# EAGLE board USBasp (EAGLE 4.16)
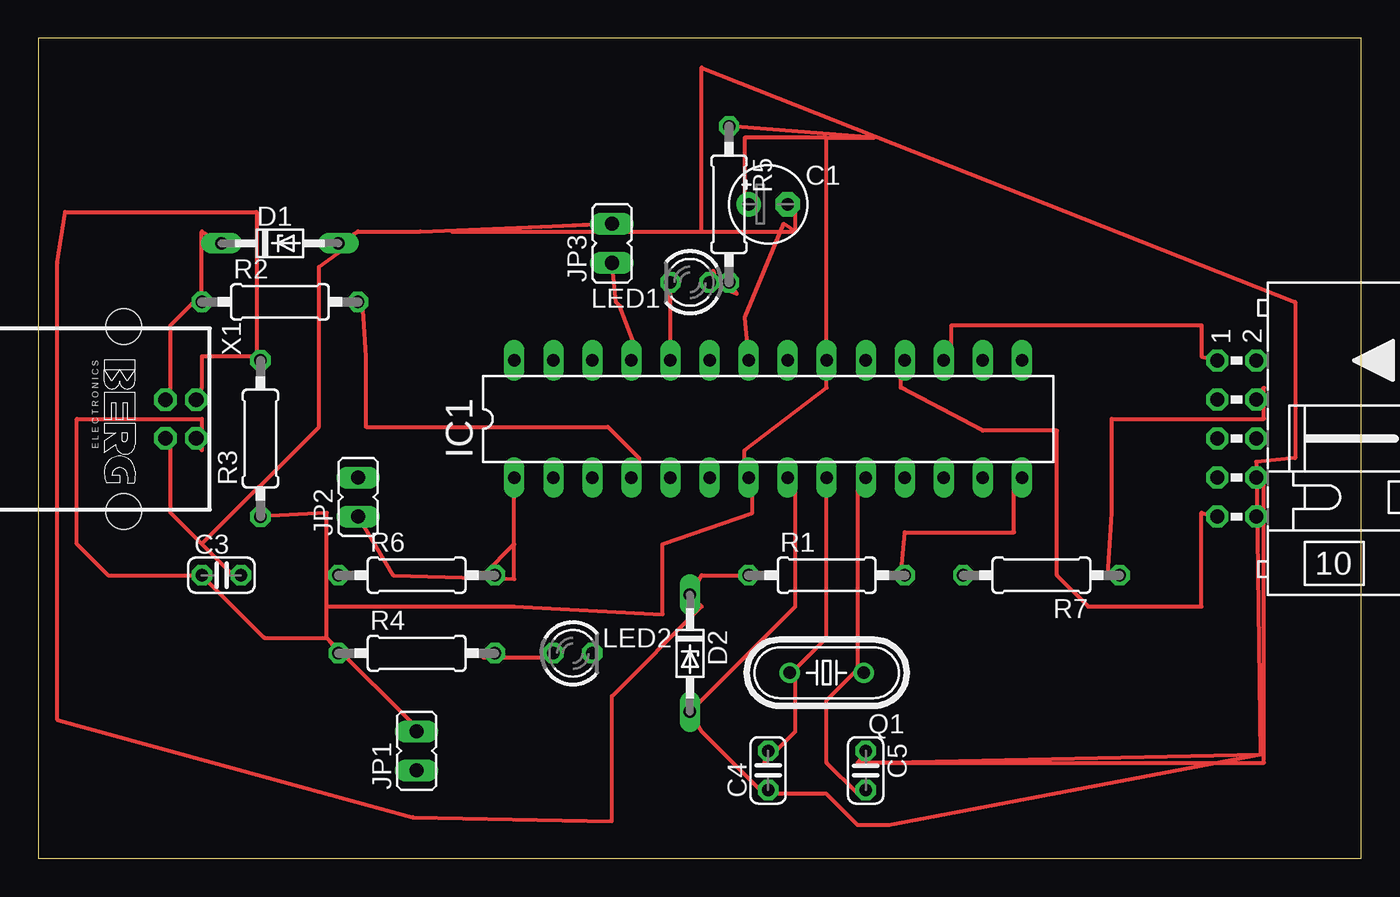
[diagram p0: board, top side]
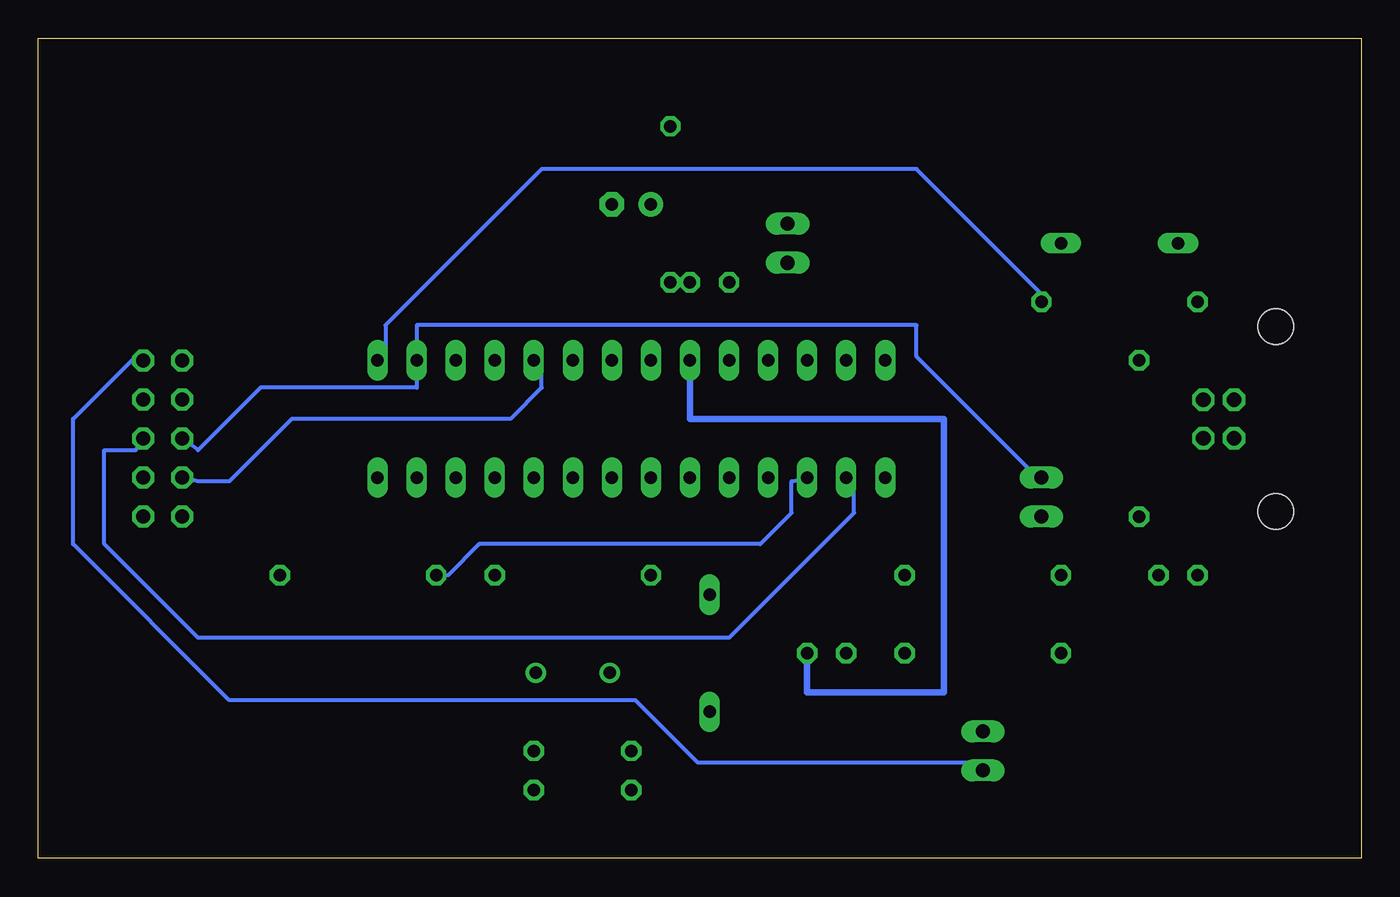
[diagram p1: board, bottom side, seen from below]

Size 86.03 x 53.33 mm. Coordinates in mm from the lower left corner, seen from the top.
Outline: 0,0 86.03,0 86.03,53.33 0,53.33 0,0
Copper layers (1*16): Top 0.035mm / dielectric 1.5mm / Bottom 0.035mm
Design rules "default": minimum track width 10mil, minimum drill 24mil, track to track 12mil, track to pad 12mil, pad to pad 12mil, via to via 12mil, smd to smd 12mil, copper to edge 40mil, drill to drill 8mil, minimum pad ring 10mil, minimum via ring 8mil, stop-mask expansion 4mil, vias tented up to drill 0mil, thermal gap 10mil

## Footprints (pad centres in the part's own frame; a part is rotated, then mirrored left to right if it is on the bottom)
E2,5-5 = drill 0.813 pad 1.6 round: + -1.27,0 | drill 0.813 pad 1.6 octagon: - 1.27,0
C025-024X044 = drill 0.813 octagon: 1 -1.27,0; 2 1.27,0
DO34Z7 = drill 0.813 long: A 3.81,0; C -3.81,0
DIL28-3 = drill 0.813 long: 1 -16.51,-3.81; 2 -13.97,-3.81; 3 -11.43,-3.81; 4 -8.89,-3.81; 5 -6.35,-3.81; 6 -3.81,-3.81; 7 -1.27,-3.81; 8 1.27,-3.81; 9 3.81,-3.81; 10 6.35,-3.81; 11 8.89,-3.81; 12 11.43,-3.81; 13 13.97,-3.81; 14 16.51,-3.81; 15 16.51,3.81; 16 13.97,3.81; 17 11.43,3.81; 18 8.89,3.81; 19 6.35,3.81; 20 3.81,3.81; 21 1.27,3.81; 22 -1.27,3.81; 23 -3.81,3.81; 24 -6.35,3.81; 25 -8.89,3.81; 26 -11.43,3.81; 27 -13.97,3.81; 28 -16.51,3.81
JP1 = drill 0.914 long: 1 0,-1.27; 2 0,1.27
LED3MM = drill 0.813 octagon: A -1.27,0; K 1.27,0
HC49/S = drill 0.813 round: 1 -2.413,0; 2 2.413,0
0207/10 = drill 0.813 octagon: 1 -5.08,0; 2 5.08,0
PN61729 = drill 0.95 octagon: 1 1.25,4.71; 2 -1.25,4.71; 3 -1.25,2.71; 4 1.25,2.71 | hole 2.3: -6.02,0; 6.02,0
ML10L = drill 0.914 octagon: 1 -5.08,-1.27; 2 -5.08,1.27; 3 -2.54,-1.27; 4 -2.54,1.27; 5 0,-1.27; 6 0,1.27; 7 2.54,-1.27; 8 2.54,1.27; 9 5.08,-1.27; 10 5.08,1.27

## Placement (x,y rotation side)
C1  4u7  [E2,5-5]  47.46,42.54 0 top
C3  100n  [C025-024X044]  11.9,18.41 0 top
C4  22p  [C025-024X044]  47.46,5.71 90 top
C5  22p  [C025-024X044]  53.81,5.71 270 top
D1  3V6  [DO34Z7]  15.71,40 0 top
D2  3V6  [DO34Z7]  42.38,13.33 270 top
IC1  ATMega48*  [DIL28-3]  47.46,28.57 0 top
JP1  Supply target  [JP1]  24.6,6.98 0 top
JP2  Self programming  [JP1]  20.79,23.49 0 top
JP3  Slow SCK  [JP1]  37.3,40 0 top
LED1  green  [LED3MM]  42.38,37.46 180 top
LED2  red  [LED3MM]  34.76,13.33 0 top
Q1  12MHz  [HC49/S]  51.27,12.06 180 top
R1  68  [0207/10]  51.27,18.41 0 top
R2  68  [0207/10]  15.71,36.19 0 top
R3  2k2  [0207/10]  14.44,27.3 90 top
R4  1k  [0207/10]  24.6,13.33 0 top
R5  1k  [0207/10]  44.92,42.54 270 top
R6  10k  [0207/10]  24.6,18.41 0 top
R7  1k  [0207/10]  65.24,18.41 180 top
X1  [PN61729]  5.55,28.57 270 top
X2  [ML10L]  77.94,27.3 270 top

## Library data of the parts
C1 C3-C5 R1-R7 = rcl
D1 D2 = diode
IC1 = atmel
JP1-JP3 = jumper
LED1 LED2 = led
Q1 = crystal
X1 = con-berg
X2 = con-harting-ml

## Nets
+5V: C1.+ C3.1 IC1.7 IC1.20 JP1.2 R3.1 R4.1 R5.1 R6.1 X1.1
GND: C1.- C3.2 C4.1 C5.1 D1.A D2.A IC1.8 IC1.22 JP3.2 X1.4 X2.8 X2.10
N$1: IC1.1 JP2.1 R6.2
N$2: IC1.16 JP2.2 X2.5
N$3: IC1.17 X2.1
N$4: IC1.19 X2.7
N$5: D2.C R1.1 R3.2 X1.2
N$6: IC1.18 X2.9
N$7: IC1.4 IC1.15 R2.2
N$8: D1.C R2.1 X1.3
N$9: IC1.3 R7.2
N$10: R7.1 X2.4
N$11: IC1.2 X2.6
N$12: IC1.25 JP3.1
N$13: LED2.A R4.2
N$14: IC1.23 LED2.K
N$15: IC1.24 LED1.K
N$16: IC1.14 R1.2
N$22: C4.2 IC1.9 Q1.2
N$23: C5.2 IC1.10 Q1.1
N$25: LED1.A R5.2
VCCINT: JP1.1 X2.2

## Tracks (layer width: path | path; a pad name or v marks a point on that pad's centre or on a via)
+5V
  Top 0.254: 51.27,46.86 45.94,46.86 45.94,42.79 C1.+ | 51.27,46.86 54.32,46.86 R5.1 | 51.27,46.86 IC1.20 51.27,30.6 45.94,26.54 45.94,24.51 IC1.7 46.44,24.51 46.44,22.47 40.6,20.44 40.6,15.87 30.95,16.38 18.76,16.38 | 18.76,18.41 18.76,22.47 R3.1 | 18.76,14.35 14.69,14.35 C3.1 4.53,18.41 2.5,20.44 2.5,28.57 10.63,28.57 10.63,26.54 X1.1 | 18.76,14.35 24.85,8.25 JP1.2 | 18.76,14.35 18.76,16.38 | 18.76,16.38 18.76,18.41 | 18.76,18.41 R6.1 | 18.76,14.35 R4.1
GND
  Top 0.254: 47.21,4.19 43.14,8.25 D2.A 49.24,16.38 49.24,24.51 IC1.8 | 55.33,6.22 79.72,6.22 79.72,22.47 | 55.33,6.22 53.3,6.22 C5.1 | 79.72,22.47 79.72,24.51 X2.8 | 79.72,22.47 X2.10 | 47.21,4.19 51.27,4.19 53.3,2.15 55.33,2.15 79.46,6.73 | 79.46,6.73 55.33,6.22 | 47.21,4.19 C4.1 | 10.63,20.44 8.6,22.47 8.6,26.54 X1.4 | 10.63,20.44 12.66,18.41 C3.2 | 49.24,40.76 48.48,41.27 45.94,35.17 IC1.22 | 49.24,40.76 49.24,42.79 C1.- | 43.14,40.76 49.24,40.76 | 43.14,40.76 26.89,40.76 JP3.2 24.85,40.76 20.79,40.76 D1.A 18.76,39.49 20.03,39.75 18.25,38.48 18.25,28.06 10.63,20.44 | 79.46,6.73 79.21,25.78 81.75,26.03 81.75,36.19 43.14,51.43 43.14,40.76
N$1
  Top 0.254: 30.95,20.44 28.92,18.41 R6.2 | JP2.1 23.08,18.41 30.95,18.16 30.95,20.44 | 30.95,20.44 IC1.1
N$2
  Bottom 0.254: X2.5 75.65,26.54 71.59,30.6 61.43,30.6 IC1.16 61.43,32.63 61.43,34.67 28.92,34.67 28.92,32.63 20.79,24.51 JP2.2
N$3
  Top 0.254: IC1.17 59.4,32.63 59.4,34.67 75.65,34.67 75.65,32.63 X2.1
N$4
  Bottom 0.254: IC1.19 53.3,32.63 53.3,30.6 55.33,28.57 69.56,28.57 73.62,24.51 75.65,24.51 X2.7
N$5
  Top 0.254: R1.1 43.14,18.41 D2.C 43.14,16.38 37.3,10.54 37.3,2.41 24.35,2.66 1.23,9.01 1.23,38.73 1.74,42.03 14.19,42.03 14.19,32.63 | 14.19,32.63 10.63,32.63 10.63,30.6 X1.2 | 14.19,32.63 14.95,32.63 R3.2
N$6
  Top 0.254: IC1.18 56.1,32.63 56.1,30.6 61.43,27.81 66.26,27.81 66.26,18.41 68.29,16.38 75.65,16.38 75.65,22.47 X2.9
N$7
  Top 0.254: IC1.4 39.08,24.51 39.08,26.03 37.05,28.06 21.3,28.06 21.3,32.63 21.04,36.7 20.79,36.7 R2.2
  Bottom 0.254: IC1.15 63.46,32.63 63.46,34.67 53.3,44.83 28.92,44.83 20.79,36.7 R2.2
N$8
  Top 0.254: 10.63,36.7 10.63,40.76 D1.C | 10.63,36.7 8.6,34.67 8.6,30.6 X1.3 | 10.63,36.7 R2.1
N$9
  Bottom 0.254: IC1.3 37.05,24.51 37.05,22.47 39.08,20.44 57.37,20.44 59.4,18.41 R7.2
N$10
  Top 0.254: R7.1 69.56,18.41 69.81,22.47 69.81,28.57 79.72,28.57 79.72,30.6 X2.4
N$11
  Bottom 0.254: IC1.2 32.98,24.51 32.98,22.47 41.11,14.35 75.65,14.35 81.75,20.44 81.75,26.54 79.72,26.54 X2.6
N$12
  Top 0.254: IC1.25 39.08,32.63 37.81,35.94 37.55,36.19 JP3.1
N$13
  Top 0.254: R4.2 28.92,13.08 32.98,13.08 LED2.A
N$14
  Bottom 0.406: IC1.23 43.65,28.57 27.14,28.57 27.14,10.79 36.03,10.79 LED2.K
N$15
  Top 0.254: IC1.24 LED1.K
N$16
  Top 0.254: R1.2 56.1,18.41 56.35,21.2 63.46,21.2 63.46,24.51 IC1.14
N$22
  Top 0.254: 49.24,12.31 49.24,8.25 47.21,6.22 C4.2 | 49.24,12.31 51.27,14.35 IC1.9 | 49.24,12.31 Q1.2
N$23
  Top 0.254: 53.3,12.31 51.27,10.28 51.27,6.22 53.3,4.19 C5.2 | 53.3,12.31 53.3,24.51 IC1.10 | 53.3,12.31 Q1.1
N$25
  Top 0.254: LED1.A 43.9,38.22 44.16,37.21 45.43,36.7 R5.2
VCCINT
  Bottom 0.254: JP1.1 24.85,6.22 43.14,6.22 47.21,10.28 73.62,10.28 83.78,20.44 83.78,28.57 79.72,32.63 X2.2